# Altium PCB MCH_MAIN.PCBDOC (part 2 of 5)
Units mil, origin at the board's own origin, x right, y up, seen from the top; angles counter-clockwise.
Board outline 7194.88 x 2984.25 mil, 8 copper layers (Top Layer, MidLayer1, MidLayer2, GND, Power, MidLayer3, MidLayer4, Bottom Layer); 584 components, 952 nets, 3896 pads, 365 vias.
Unrouted connection lines stored in the file: 2112.
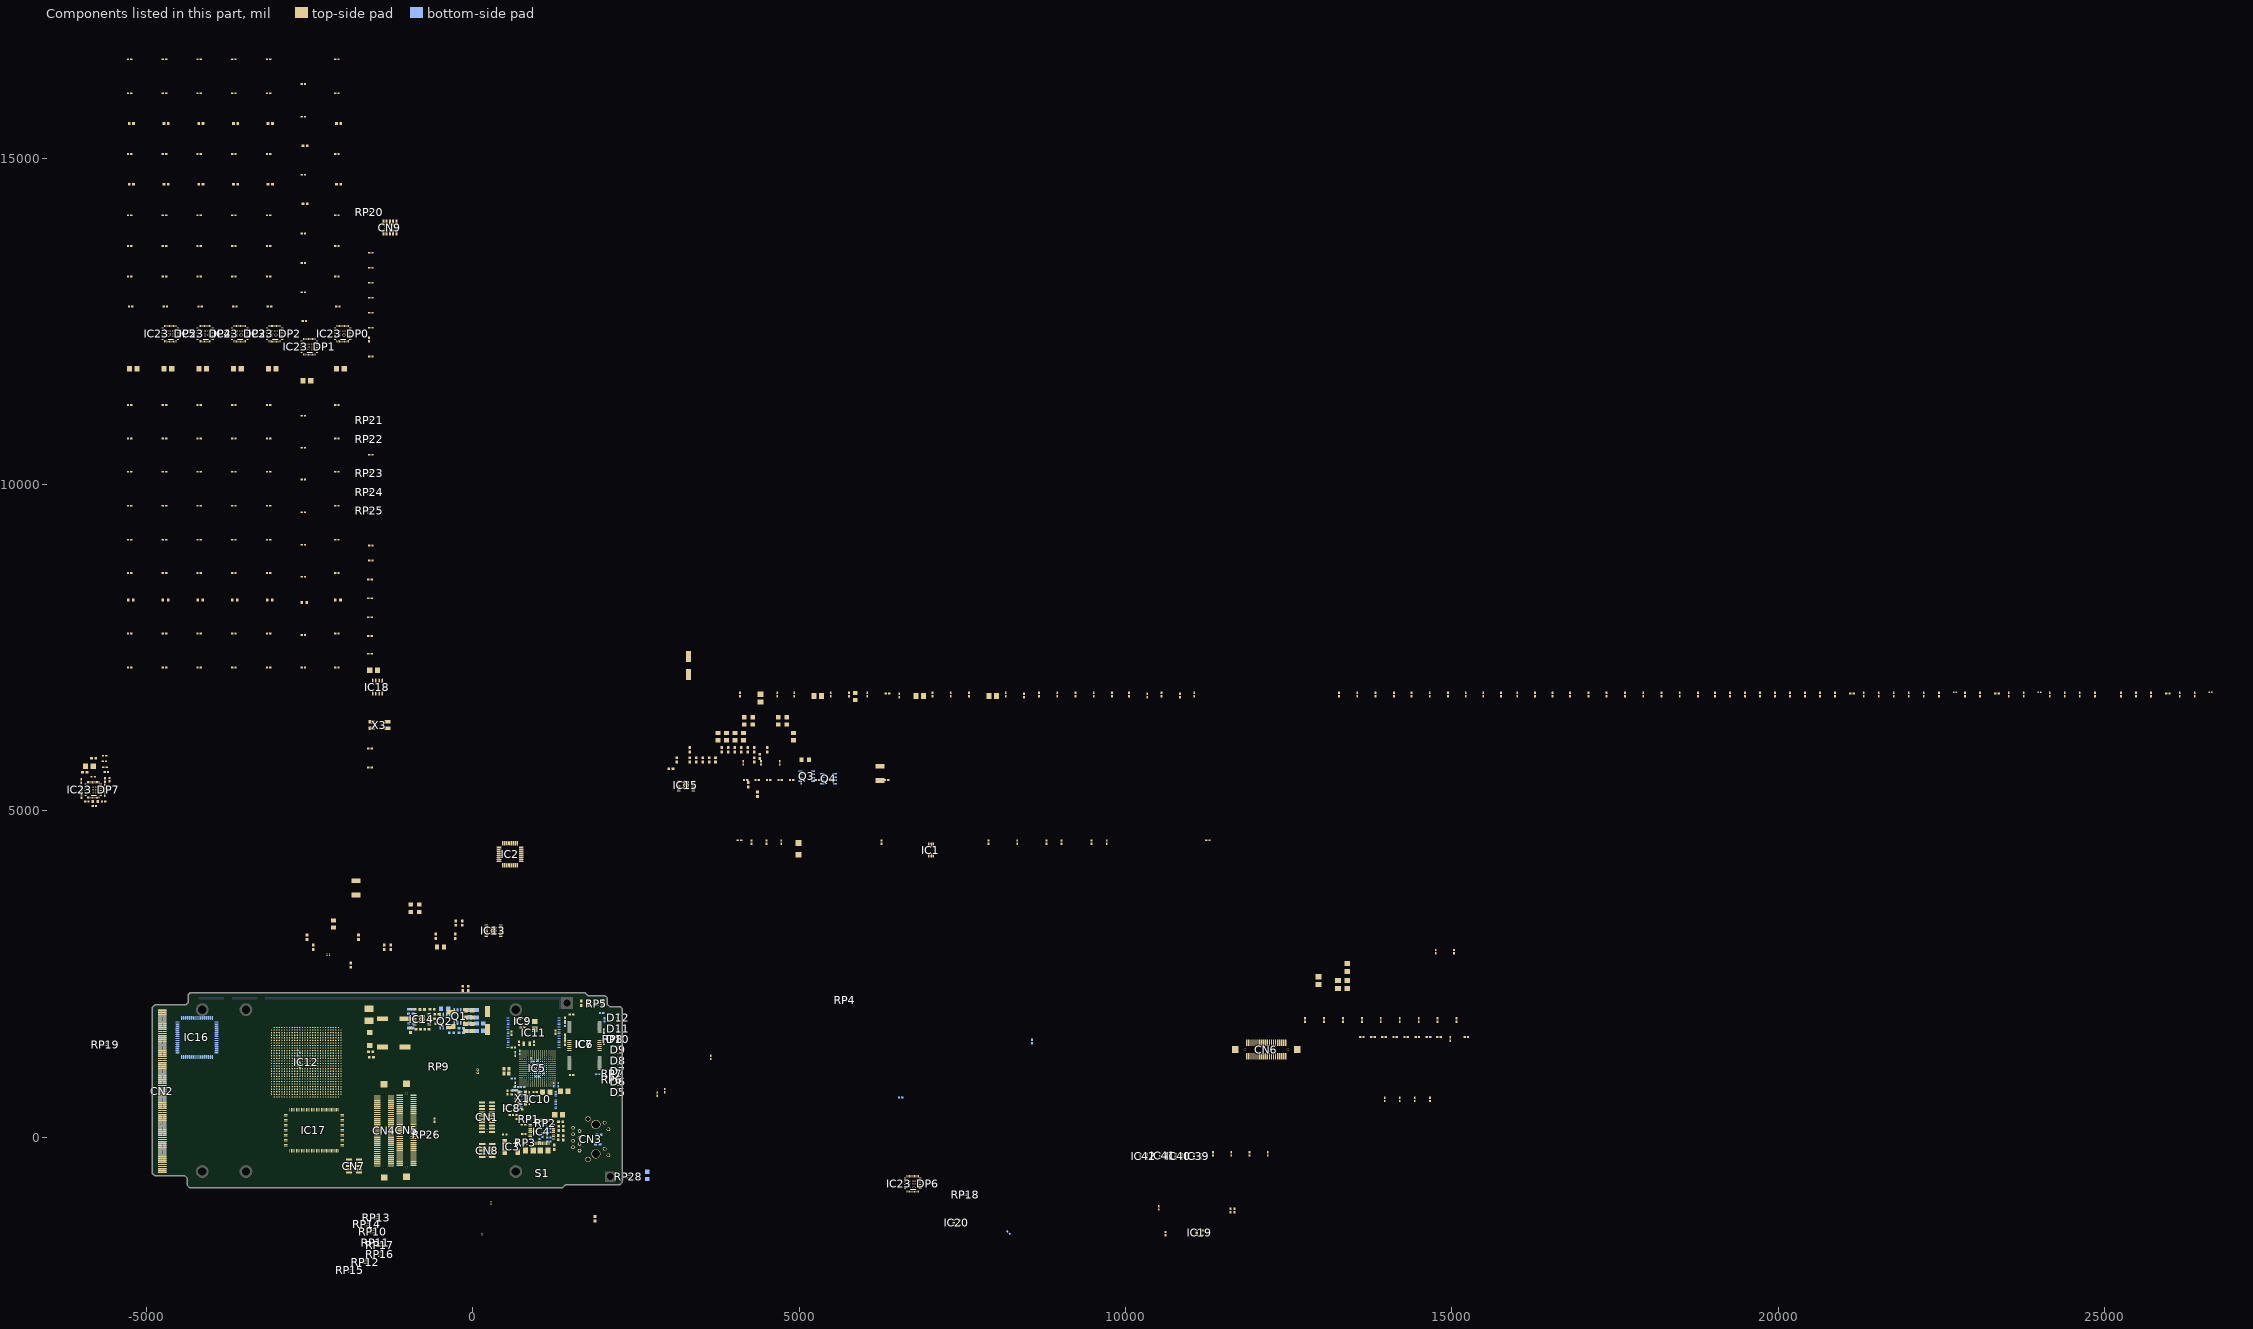
[diagram p5: the components of this part, seen from the top]

## Footprints (in the part's own frame and the unit in brackets; to place one, negate y for a bottom-side part, rotate by r counter-clockwise, add the part's x,y. Pads: shape width x height; smd on the part's side, far side on the other; paste and mask are expansions set on the pad)
64A_L [mm] "Thin QFP, 64-Leads, Body 14x14mm, Pitch 0.8mm, IPC High Density"
  oval 1.45x0.55 smd: 1(-7.6,6) 2(-7.6,5.2) 3(-7.6,4.4) 4(-7.6,3.6) 5(-7.6,2.8) 6(-7.6,2) 7(-7.6,1.2) 8(-7.6,0.4) 9(-7.6,-0.4) 10(-7.6,-1.2) 11(-7.6,-2) 12(-7.6,-2.8) 13(-7.6,-3.6) 14(-7.6,-4.4) 15(-7.6,-5.2) 16(-7.6,-6) 33(7.6,-6) 34(7.6,-5.2) 35(7.6,-4.4) 36(7.6,-3.6) 37(7.6,-2.8) 38(7.6,-2) 39(7.6,-1.2) 40(7.6,-0.4) 41(7.6,0.4) 42(7.6,1.2) 43(7.6,2) 44(7.6,2.8) 45(7.6,3.6) 46(7.6,4.4) 47(7.6,5.2) 48(7.6,6)
  oval 0.55x1.45 smd: 17(-6,-7.6) 18(-5.2,-7.6) 19(-4.4,-7.6) 20(-3.6,-7.6) 21(-2.8,-7.6) 22(-2,-7.6) 23(-1.2,-7.6) 24(-0.4,-7.6) 25(0.4,-7.6) 26(1.2,-7.6) 27(2,-7.6) 28(2.8,-7.6) 29(3.6,-7.6) 30(4.4,-7.6) 31(5.2,-7.6) 32(6,-7.6) 49(6,7.6) 50(5.2,7.6) 51(4.4,7.6) 52(3.6,7.6) 53(2.8,7.6) 54(2,7.6) 55(1.2,7.6) 56(0.4,7.6) 57(-0.4,7.6) 58(-1.2,7.6) 59(-2,7.6) 60(-2.8,7.6) 61(-3.6,7.6) 62(-4.4,7.6) 63(-5.2,7.6) 64(-6,7.6)
  silkscreen extent -7.72,-6.45 6.45,6.95, body extent -7,-7 7,7, height 1.2
ABRACON_ABMM [mm]
  rect 2.4x1.4 smd: 1(0,-2.6) 2(0,0) 3(6.3,0) 4(6.3,-2.6)
  silkscreen extent -1.52,-3.8 7.9,1.2
CC1005-0402 [mm]
  rect 0.9x0.7 smd: 1(-0.65,0) 2(0.65,0)
  silkscreen extent -1.5,-0.75 1,0.75
CC1608-0603 [mm]
  rect 1.1x1 smd: 1(-0.85,0) 2(0.85,0)
  silkscreen extent -1.8,-0.9 1.3,0.9
CC3216-1206 [mm]
  rect 1.6x1.8 smd: 1(-1.4,0) 2(1.4,0)
  silkscreen extent -2.6,-1.3 2.1,1.3
CD1608-0603 [mm] "Chip Diode; Body 1.6 x 0.8 mm (LxW typ)"
  rect 1.1x1 smd: 1(-0.85,0) 2(0.85,0)
  silkscreen extent 1.7,-0.4 1.7,0.4
CD2012-0805 [mm] "Chip Diode; Body 2.0 x 1.3 mm (LxW typ)"
  rect 1.3x1.5 smd: 1(-0.95,0) 2(0.95,0)
  silkscreen extent 1.9,-0.65 1.9,0.65
CD3216-1206 [mm] "Chip Diode; Body 3.2 x 1.6 mm (LxW typ)"
  rect 1.6x1.8 smd: 1(-1.4,0) 2(1.4,0)
  silkscreen extent -0.3,-0.8 0.3,0.8
CFPS_73 [mm]
  rect 1.8x2 smd: 1(0,-4.2) 2(5.08,-4.2) 3(5.08,0) 4(0,0)
  silkscreen extent -1.52,-5.59 6.6,1.52
con_1x2_1.27 [mm]
  round 1 hole 0.6 unplated: 1(0,0) 2(1.27,0)
  silkscreen extent -0.72,-0.75 1.98,0.75
CR1005-0402 [mm]
  rect 0.9x0.7 smd: 1(-0.65,0) 2(0.65,0)
  silkscreen extent -1.5,-0.75 1.5,0.75
CR1608-0603 [mm]
  rect 1.1x1 smd: 1(-0.85,0) 2(0.85,0)
  silkscreen extent -1.8,-0.9 1.8,0.9
DO-214AA/SMB [mm] "diode (Maritex)"
  rect 2x2 smd: A(-2.55,0) K(2.55,0)
  silkscreen extent -3.4,-1.75 3.5,1.75
DUOLED_LNJ123 [mm]
  rect 0.5x0.7 smd: 1(0.25,0) 2(3.05,0)
  rect 0.6x0.5 smd: 3(1.65,0.35)
  Top Layer region: 0.45,0.15 0.75,0.15 0.75,0.35 0.45,0.35
  Top Layer region: 0.45,-0.35 0.75,-0.35 0.75,-0.15 0.45,-0.15
  Top Layer region: 2.85,0.35 2.55,0.35 2.55,0.15 2.85,0.15
  Top Layer region: 2.85,-0.15 2.55,-0.15 2.55,-0.35 2.85,-0.35
  silkscreen extent -0.3,-1.45 3.6,0.7
eTSSOP_16_MX [mm] "SOP, 16-Leads, Body 5x4.4mm, Pitch 0.65mm, IPC High Density"
  oval 1.4x0.35 smd: 1(-2.8,2.275) 2(-2.8,1.625) 3(-2.8,0.975) 4(-2.8,0.325) 5(-2.8,-0.325) 6(-2.8,-0.975) 7(-2.8,-1.625) 8(-2.8,-2.275) 9(2.8,-2.275) 10(2.8,-1.625) 11(2.8,-0.975) 12(2.8,-0.325) 13(2.8,0.325) 14(2.8,0.975) 15(2.8,1.625) 16(2.8,2.275)
  round 1.2 hole 0.6: PAD(-0.55,1.1) PAD(-0.55,0) PAD(-0.55,-1.1) PAD(0.55,1.1) PAD(0.55,0) PAD(0.55,-1.1)
  Top Layer region: -1.15,-1.7 1.15,-1.7 1.15,1.7 -1.15,1.7
  silkscreen extent -2.93,-2.55 1.7,3.12
FBGA780-2 [mm] "BGA, 780-Leads, Body 29x29mm, Pitch 1mm"
  round 0.5 smd: A2(-12.5,13.5) A3(-11.5,13.5) A4(-10.5,13.5) A5(-9.5,13.5) A6(-8.5,13.5) A7(-7.5,13.5) A8(-6.5,13.5) A9(-5.5,13.5) A10(-4.5,13.5) A11(-3.5,13.5) A12(-2.5,13.5) A13(-1.5,13.5) A14(-0.5,13.5) A15(0.5,13.5) A16(1.5,13.5) A17(2.5,13.5) A18(3.5,13.5) A19(4.5,13.5) A20(5.5,13.5) A21(6.5,13.5) A22(7.5,13.5) A23(8.5,13.5) A24(9.5,13.5) A25(10.5,13.5) A26(11.5,13.5) A27(12.5,13.5) AA1(-13.5,-6.5) AA2(-12.5,-6.5) AA3(-11.5,-6.5) AA4(-10.5,-6.5) AA5(-9.5,-6.5) AA6(-8.5,-6.5) AA7(-7.5,-6.5) AA8(-6.5,-6.5) AA9(-5.5,-6.5) AA10(-4.5,-6.5) AA11(-3.5,-6.5) AA12(-2.5,-6.5) AA13(-1.5,-6.5) AA14(-0.5,-6.5) AA15(0.5,-6.5) AA16(1.5,-6.5) AA17(2.5,-6.5) AA18(3.5,-6.5) AA19(4.5,-6.5) AA20(5.5,-6.5) AA21(6.5,-6.5) AA22(7.5,-6.5) AA23(8.5,-6.5) AA24(9.5,-6.5) AA25(10.5,-6.5) AA26(11.5,-6.5) AA27(12.5,-6.5) AA28(13.5,-6.5) AB1(-13.5,-7.5) AB2(-12.5,-7.5) AB3(-11.5,-7.5) AB4(-10.5,-7.5) AB5(-9.5,-7.5) AB6(-8.5,-7.5) AB7(-7.5,-7.5) AB8(-6.5,-7.5) AB9(-5.5,-7.5) AB10(-4.5,-7.5) AB11(-3.5,-7.5) AB12(-2.5,-7.5) AB13(-1.5,-7.5) AB14(-0.5,-7.5) AB15(0.5,-7.5) AB16(1.5,-7.5) AB17(2.5,-7.5) AB18(3.5,-7.5) AB19(4.5,-7.5) AB20(5.5,-7.5) AB21(6.5,-7.5) AB22(7.5,-7.5) AB23(8.5,-7.5) AB24(9.5,-7.5) AB25(10.5,-7.5) AB26(11.5,-7.5) AB27(12.5,-7.5) AB28(13.5,-7.5) AC1(-13.5,-8.5) AC2(-12.5,-8.5) AC3(-11.5,-8.5) AC4(-10.5,-8.5) AC5(-9.5,-8.5) AC6(-8.5,-8.5) AC7(-7.5,-8.5) AC8(-6.5,-8.5) AC9(-5.5,-8.5) AC10(-4.5,-8.5) AC11(-3.5,-8.5) AC12(-2.5,-8.5) AC13(-1.5,-8.5) AC14(-0.5,-8.5) AC15(0.5,-8.5) AC16(1.5,-8.5) AC17(2.5,-8.5) AC18(3.5,-8.5) AC19(4.5,-8.5) AC20(5.5,-8.5) AC21(6.5,-8.5) AC22(7.5,-8.5) AC23(8.5,-8.5) AC24(9.5,-8.5) AC25(10.5,-8.5) AC26(11.5,-8.5) AC27(12.5,-8.5) AC28(13.5,-8.5) AD1(-13.5,-9.5) AD2(-12.5,-9.5) AD3(-11.5,-9.5) AD4(-10.5,-9.5) AD5(-9.5,-9.5) AD6(-8.5,-9.5) AD7(-7.5,-9.5) AD8(-6.5,-9.5) AD9(-5.5,-9.5) AD10(-4.5,-9.5) AD11(-3.5,-9.5) AD12(-2.5,-9.5) AD13(-1.5,-9.5) AD14(-0.5,-9.5) AD15(0.5,-9.5) AD16(1.5,-9.5) AD17(2.5,-9.5) AD18(3.5,-9.5) AD19(4.5,-9.5) AD20(5.5,-9.5) AD21(6.5,-9.5) AD22(7.5,-9.5) AD23(8.5,-9.5) AD24(9.5,-9.5) AD25(10.5,-9.5) AD26(11.5,-9.5) AD27(12.5,-9.5) AD28(13.5,-9.5) AE1(-13.5,-10.5) AE2(-12.5,-10.5) AE3(-11.5,-10.5) AE4(-10.5,-10.5) AE5(-9.5,-10.5) AE6(-8.5,-10.5) AE7(-7.5,-10.5) AE8(-6.5,-10.5) AE9(-5.5,-10.5) AE10(-4.5,-10.5) AE11(-3.5,-10.5) AE12(-2.5,-10.5) AE13(-1.5,-10.5) AE14(-0.5,-10.5) AE15(0.5,-10.5) AE16(1.5,-10.5) AE17(2.5,-10.5) AE18(3.5,-10.5) AE19(4.5,-10.5) AE20(5.5,-10.5) AE21(6.5,-10.5) AE22(7.5,-10.5) AE23(8.5,-10.5) AE24(9.5,-10.5) AE25(10.5,-10.5) AE26(11.5,-10.5) AE27(12.5,-10.5) AE28(13.5,-10.5) AF1(-13.5,-11.5) AF2(-12.5,-11.5) AF3(-11.5,-11.5) AF4(-10.5,-11.5) AF5(-9.5,-11.5) AF6(-8.5,-11.5) AF7(-7.5,-11.5) AF8(-6.5,-11.5) AF9(-5.5,-11.5) AF10(-4.5,-11.5) AF11(-3.5,-11.5) AF12(-2.5,-11.5) AF13(-1.5,-11.5) AF14(-0.5,-11.5) AF15(0.5,-11.5) AF16(1.5,-11.5) AF17(2.5,-11.5) AF18(3.5,-11.5) AF19(4.5,-11.5) AF20(5.5,-11.5) AF21(6.5,-11.5) AF22(7.5,-11.5) AF23(8.5,-11.5) AF24(9.5,-11.5) AF25(10.5,-11.5) AF26(11.5,-11.5) AF27(12.5,-11.5) AF28(13.5,-11.5) AG1(-13.5,-12.5) AG2(-12.5,-12.5) AG3(-11.5,-12.5) AG4(-10.5,-12.5) AG5(-9.5,-12.5) AG6(-8.5,-12.5) AG7(-7.5,-12.5) AG8(-6.5,-12.5) AG9(-5.5,-12.5) AG10(-4.5,-12.5) AG11(-3.5,-12.5) AG12(-2.5,-12.5) AG13(-1.5,-12.5) AG14(-0.5,-12.5) AG15(0.5,-12.5) AG16(1.5,-12.5) AG17(2.5,-12.5) AG18(3.5,-12.5) AG19(4.5,-12.5) AG20(5.5,-12.5) AG21(6.5,-12.5) AG22(7.5,-12.5) AG23(8.5,-12.5) AG24(9.5,-12.5) AG25(10.5,-12.5) AG26(11.5,-12.5) AG27(12.5,-12.5) AG28(13.5,-12.5) AH2(-12.5,-13.5) AH3(-11.5,-13.5) AH4(-10.5,-13.5) AH5(-9.5,-13.5) AH6(-8.5,-13.5) AH7(-7.5,-13.5) AH8(-6.5,-13.5) AH9(-5.5,-13.5) AH10(-4.5,-13.5) AH11(-3.5,-13.5) AH12(-2.5,-13.5) AH13(-1.5,-13.5) AH14(-0.5,-13.5) AH15(0.5,-13.5) AH16(1.5,-13.5) AH17(2.5,-13.5) AH18(3.5,-13.5) AH19(4.5,-13.5) AH20(5.5,-13.5) AH21(6.5,-13.5) AH22(7.5,-13.5) AH23(8.5,-13.5) AH24(9.5,-13.5) AH25(10.5,-13.5) AH26(11.5,-13.5) AH27(12.5,-13.5) B1(-13.5,12.5) B2(-12.5,12.5) B3(-11.5,12.5) B4(-10.5,12.5) B5(-9.5,12.5) B6(-8.5,12.5) B7(-7.5,12.5) B8(-6.5,12.5) B9(-5.5,12.5) B10(-4.5,12.5) B11(-3.5,12.5) B12(-2.5,12.5) B13(-1.5,12.5) B14(-0.5,12.5) B15(0.5,12.5) B16(1.5,12.5) B17(2.5,12.5) B18(3.5,12.5) B19(4.5,12.5) B20(5.5,12.5) B21(6.5,12.5) B22(7.5,12.5) B23(8.5,12.5) B24(9.5,12.5) B25(10.5,12.5) B26(11.5,12.5) B27(12.5,12.5) B28(13.5,12.5) C1(-13.5,11.5) C2(-12.5,11.5) C3(-11.5,11.5) C4(-10.5,11.5) C5(-9.5,11.5) C6(-8.5,11.5) C7(-7.5,11.5) C8(-6.5,11.5) C9(-5.5,11.5) C10(-4.5,11.5) C11(-3.5,11.5) C12(-2.5,11.5) C13(-1.5,11.5) C14(-0.5,11.5) C15(0.5,11.5) C16(1.5,11.5) C17(2.5,11.5) C18(3.5,11.5) C19(4.5,11.5) C20(5.5,11.5) C21(6.5,11.5) C22(7.5,11.5) C23(8.5,11.5) C24(9.5,11.5) C25(10.5,11.5) C26(11.5,11.5) C27(12.5,11.5) C28(13.5,11.5) D1(-13.5,10.5) D2(-12.5,10.5) D3(-11.5,10.5) D4(-10.5,10.5) D5(-9.5,10.5) D6(-8.5,10.5) D7(-7.5,10.5) D8(-6.5,10.5) D9(-5.5,10.5) D10(-4.5,10.5) D11(-3.5,10.5) D12(-2.5,10.5) D13(-1.5,10.5) D14(-0.5,10.5) D15(0.5,10.5) D16(1.5,10.5) D17(2.5,10.5) D18(3.5,10.5) D19(4.5,10.5) D20(5.5,10.5) D21(6.5,10.5) D22(7.5,10.5) D23(8.5,10.5) D24(9.5,10.5) D25(10.5,10.5) D26(11.5,10.5) D27(12.5,10.5) D28(13.5,10.5) E1(-13.5,9.5) E2(-12.5,9.5) E3(-11.5,9.5) E4(-10.5,9.5) E5(-9.5,9.5) E6(-8.5,9.5) E7(-7.5,9.5) E8(-6.5,9.5) E9(-5.5,9.5) E10(-4.5,9.5) E11(-3.5,9.5) E12(-2.5,9.5) E13(-1.5,9.5) E14(-0.5,9.5) E15(0.5,9.5) E16(1.5,9.5) E17(2.5,9.5) E18(3.5,9.5) E19(4.5,9.5) E20(5.5,9.5) E21(6.5,9.5) E22(7.5,9.5) E23(8.5,9.5) E24(9.5,9.5) E25(10.5,9.5) E26(11.5,9.5) E27(12.5,9.5) E28(13.5,9.5) F1(-13.5,8.5) F2(-12.5,8.5) F3(-11.5,8.5) F4(-10.5,8.5) F5(-9.5,8.5) F6(-8.5,8.5) F7(-7.5,8.5) F8(-6.5,8.5) F9(-5.5,8.5) F10(-4.5,8.5) F11(-3.5,8.5) F12(-2.5,8.5) F13(-1.5,8.5) F14(-0.5,8.5) F15(0.5,8.5) F16(1.5,8.5) F17(2.5,8.5) F18(3.5,8.5) F19(4.5,8.5) F20(5.5,8.5) F21(6.5,8.5) F22(7.5,8.5) F23(8.5,8.5) F24(9.5,8.5) F25(10.5,8.5) F26(11.5,8.5) F27(12.5,8.5) F28(13.5,8.5) G1(-13.5,7.5) G2(-12.5,7.5) G3(-11.5,7.5) G4(-10.5,7.5) G5(-9.5,7.5) G6(-8.5,7.5) G7(-7.5,7.5) G8(-6.5,7.5) G9(-5.5,7.5) G10(-4.5,7.5) G11(-3.5,7.5) G12(-2.5,7.5) G13(-1.5,7.5) G14(-0.5,7.5) G15(0.5,7.5) G16(1.5,7.5) G17(2.5,7.5) G18(3.5,7.5) G19(4.5,7.5) G20(5.5,7.5) G21(6.5,7.5) G22(7.5,7.5) G23(8.5,7.5) G24(9.5,7.5) G25(10.5,7.5) G26(11.5,7.5) G27(12.5,7.5) G28(13.5,7.5) H1(-13.5,6.5) H2(-12.5,6.5) H3(-11.5,6.5) H4(-10.5,6.5) H5(-9.5,6.5) H6(-8.5,6.5) H7(-7.5,6.5) H8(-6.5,6.5) H9(-5.5,6.5) H10(-4.5,6.5) H11(-3.5,6.5) H12(-2.5,6.5) H13(-1.5,6.5) H14(-0.5,6.5) H15(0.5,6.5) H16(1.5,6.5) H17(2.5,6.5) H18(3.5,6.5) H19(4.5,6.5) H20(5.5,6.5) H21(6.5,6.5) H22(7.5,6.5) H23(8.5,6.5) H24(9.5,6.5) H25(10.5,6.5) H26(11.5,6.5) H27(12.5,6.5) H28(13.5,6.5) J1(-13.5,5.5) J2(-12.5,5.5) J3(-11.5,5.5) J4(-10.5,5.5) J5(-9.5,5.5) J6(-8.5,5.5) J7(-7.5,5.5) J8(-6.5,5.5) J9(-5.5,5.5) J10(-4.5,5.5) J11(-3.5,5.5) J12(-2.5,5.5) J13(-1.5,5.5) J14(-0.5,5.5) J15(0.5,5.5) J16(1.5,5.5) J17(2.5,5.5) J18(3.5,5.5) J19(4.5,5.5) J20(5.5,5.5) J21(6.5,5.5) J22(7.5,5.5) J23(8.5,5.5) J24(9.5,5.5) J25(10.5,5.5) J26(11.5,5.5) J27(12.5,5.5) J28(13.5,5.5) K1(-13.5,4.5) K2(-12.5,4.5) K3(-11.5,4.5) K4(-10.5,4.5) K5(-9.5,4.5) K6(-8.5,4.5) K7(-7.5,4.5) K8(-6.5,4.5) K9(-5.5,4.5) K10(-4.5,4.5) K11(-3.5,4.5) K12(-2.5,4.5) K13(-1.5,4.5) K14(-0.5,4.5) K15(0.5,4.5) K16(1.5,4.5) K17(2.5,4.5) K18(3.5,4.5) K19(4.5,4.5) K20(5.5,4.5) K21(6.5,4.5) K22(7.5,4.5) K23(8.5,4.5) K24(9.5,4.5) K25(10.5,4.5) K26(11.5,4.5) K27(12.5,4.5) K28(13.5,4.5) L1(-13.5,3.5) L2(-12.5,3.5) L3(-11.5,3.5) L4(-10.5,3.5) L5(-9.5,3.5) L6(-8.5,3.5) L7(-7.5,3.5) L8(-6.5,3.5) L9(-5.5,3.5) L10(-4.5,3.5) L11(-3.5,3.5) L12(-2.5,3.5) L13(-1.5,3.5) L14(-0.5,3.5) L15(0.5,3.5) L16(1.5,3.5) L17(2.5,3.5) L18(3.5,3.5) L19(4.5,3.5) L20(5.5,3.5) L21(6.5,3.5) L22(7.5,3.5) L23(8.5,3.5) L24(9.5,3.5) L25(10.5,3.5) L26(11.5,3.5) L27(12.5,3.5) L28(13.5,3.5) M1(-13.5,2.5) M2(-12.5,2.5) M3(-11.5,2.5) M4(-10.5,2.5) M5(-9.5,2.5) M6(-8.5,2.5) M7(-7.5,2.5) M8(-6.5,2.5) M9(-5.5,2.5) M10(-4.5,2.5) M11(-3.5,2.5) M12(-2.5,2.5) M13(-1.5,2.5) M14(-0.5,2.5) M15(0.5,2.5) M16(1.5,2.5) M17(2.5,2.5) M18(3.5,2.5) M19(4.5,2.5) M20(5.5,2.5) M21(6.5,2.5) M22(7.5,2.5) M23(8.5,2.5) M24(9.5,2.5) M25(10.5,2.5) M26(11.5,2.5) M27(12.5,2.5) M28(13.5,2.5) N1(-13.5,1.5) N2(-12.5,1.5) N3(-11.5,1.5) N4(-10.5,1.5) N5(-9.5,1.5) N6(-8.5,1.5) N7(-7.5,1.5) N8(-6.5,1.5) N9(-5.5,1.5) N10(-4.5,1.5) N11(-3.5,1.5) N12(-2.5,1.5) N13(-1.5,1.5) N14(-0.5,1.5) N15(0.5,1.5) N16(1.5,1.5) N17(2.5,1.5) N18(3.5,1.5) N19(4.5,1.5) N20(5.5,1.5) N21(6.5,1.5) N22(7.5,1.5) N23(8.5,1.5) N24(9.5,1.5) N25(10.5,1.5) N26(11.5,1.5) N27(12.5,1.5) N28(13.5,1.5) P1(-13.5,0.5) P2(-12.5,0.5) P3(-11.5,0.5) P4(-10.5,0.5) P5(-9.5,0.5) P6(-8.5,0.5) P7(-7.5,0.5) P8(-6.5,0.5) P9(-5.5,0.5) P10(-4.5,0.5) P11(-3.5,0.5) P12(-2.5,0.5) P13(-1.5,0.5) P14(-0.5,0.5) P15(0.5,0.5) P16(1.5,0.5) P17(2.5,0.5) P18(3.5,0.5) P19(4.5,0.5) P20(5.5,0.5) P21(6.5,0.5) P22(7.5,0.5) P23(8.5,0.5) P24(9.5,0.5) P25(10.5,0.5) P26(11.5,0.5) P27(12.5,0.5) P28(13.5,0.5) R1(-13.5,-0.5) R2(-12.5,-0.5) R3(-11.5,-0.5) R4(-10.5,-0.5) R5(-9.5,-0.5) R6(-8.5,-0.5) R7(-7.5,-0.5) R8(-6.5,-0.5) R9(-5.5,-0.5) R10(-4.5,-0.5) R11(-3.5,-0.5) R12(-2.5,-0.5) R13(-1.5,-0.5) R14(-0.5,-0.5) R15(0.5,-0.5) R16(1.5,-0.5) R17(2.5,-0.5) R18(3.5,-0.5) R19(4.5,-0.5) R20(5.5,-0.5) R21(6.5,-0.5) R22(7.5,-0.5) R23(8.5,-0.5) R24(9.5,-0.5) R25(10.5,-0.5) R26(11.5,-0.5) R27(12.5,-0.5) R28(13.5,-0.5) T1(-13.5,-1.5) T2(-12.5,-1.5) T3(-11.5,-1.5) T4(-10.5,-1.5) T5(-9.5,-1.5) T6(-8.5,-1.5) T7(-7.5,-1.5) T8(-6.5,-1.5) T9(-5.5,-1.5) T10(-4.5,-1.5) T11(-3.5,-1.5) T12(-2.5,-1.5) T13(-1.5,-1.5) T14(-0.5,-1.5) T15(0.5,-1.5) T16(1.5,-1.5) T17(2.5,-1.5) T18(3.5,-1.5) T19(4.5,-1.5) T20(5.5,-1.5) T21(6.5,-1.5) T22(7.5,-1.5) T23(8.5,-1.5) T24(9.5,-1.5) T25(10.5,-1.5) T26(11.5,-1.5) T27(12.5,-1.5) T28(13.5,-1.5) U1(-13.5,-2.5) U2(-12.5,-2.5) U3(-11.5,-2.5) U4(-10.5,-2.5) U5(-9.5,-2.5) U6(-8.5,-2.5) U7(-7.5,-2.5) U8(-6.5,-2.5) U9(-5.5,-2.5) U10(-4.5,-2.5) U11(-3.5,-2.5) U12(-2.5,-2.5) U13(-1.5,-2.5) U14(-0.5,-2.5) U15(0.5,-2.5) U16(1.5,-2.5) U17(2.5,-2.5) U18(3.5,-2.5) U19(4.5,-2.5) U20(5.5,-2.5) U21(6.5,-2.5) U22(7.5,-2.5) U23(8.5,-2.5) U24(9.5,-2.5) U25(10.5,-2.5) U26(11.5,-2.5) U27(12.5,-2.5) U28(13.5,-2.5) V1(-13.5,-3.5) V2(-12.5,-3.5) V3(-11.5,-3.5) V4(-10.5,-3.5) V5(-9.5,-3.5) V6(-8.5,-3.5) V7(-7.5,-3.5) V8(-6.5,-3.5) V9(-5.5,-3.5) V10(-4.5,-3.5) V11(-3.5,-3.5) V12(-2.5,-3.5) V13(-1.5,-3.5) V14(-0.5,-3.5) V15(0.5,-3.5) V16(1.5,-3.5) V17(2.5,-3.5) V18(3.5,-3.5) V19(4.5,-3.5) V20(5.5,-3.5) V21(6.5,-3.5) V22(7.5,-3.5) V23(8.5,-3.5) V24(9.5,-3.5) V25(10.5,-3.5) V26(11.5,-3.5) V27(12.5,-3.5) V28(13.5,-3.5) W1(-13.5,-4.5) W2(-12.5,-4.5) W3(-11.5,-4.5) W4(-10.5,-4.5) W5(-9.5,-4.5) W6(-8.5,-4.5) W7(-7.5,-4.5) W8(-6.5,-4.5) W9(-5.5,-4.5) W10(-4.5,-4.5) W11(-3.5,-4.5) W12(-2.5,-4.5) W13(-1.5,-4.5) W14(-0.5,-4.5) W15(0.5,-4.5) W16(1.5,-4.5) W17(2.5,-4.5) W18(3.5,-4.5) W19(4.5,-4.5) W20(5.5,-4.5) W21(6.5,-4.5) W22(7.5,-4.5) W23(8.5,-4.5) W24(9.5,-4.5) W25(10.5,-4.5) W26(11.5,-4.5) W27(12.5,-4.5) W28(13.5,-4.5) Y1(-13.5,-5.5) Y2(-12.5,-5.5) Y3(-11.5,-5.5) Y4(-10.5,-5.5) Y5(-9.5,-5.5) Y6(-8.5,-5.5) Y7(-7.5,-5.5) Y8(-6.5,-5.5) Y9(-5.5,-5.5) Y10(-4.5,-5.5) Y11(-3.5,-5.5) Y12(-2.5,-5.5) Y13(-1.5,-5.5) Y14(-0.5,-5.5) Y15(0.5,-5.5) Y16(1.5,-5.5) Y17(2.5,-5.5) Y18(3.5,-5.5) Y19(4.5,-5.5) Y20(5.5,-5.5) Y21(6.5,-5.5) Y22(7.5,-5.5) Y23(8.5,-5.5) Y24(9.5,-5.5) Y25(10.5,-5.5) Y26(11.5,-5.5) Y27(12.5,-5.5) Y28(13.5,-5.5)
  silkscreen extent -15.27,-14.5 14.5,14.5, body extent -14.5,-14.5 14.5,14.5, height 2.6
IHLP2525 [mm]
  rect 1.9x3.5 smd: 1(-2.75,0) 2(2.75,0)
  silkscreen extent -3.4,-3.3 3.45,3.2
INDC1005-0402 [mm] "Chip Inductor; Body 1 x 0.5 mm (LxW typ)"
  rect 0.6x0.5 smd: 1(-0.5,0) 2(0.5,0)
  silkscreen extent -1.1,-0.15 -1.1,0.15
INDC1608-0603 [mm] "Chip Inductor; Body 1.6 x 0.8 mm (LxW typ)"
  rect 0.9x0.8 smd: 1(-0.7,0) 2(0.7,0)
  silkscreen extent -1.45,-0.3 -1.45,0.3
INDC2012-0805 [mm] "Chip Inductor; Body 2 x 1.2 mm (LxW typ)"
  rect 1x1.2 smd: 1(-1,0) 2(1,0)
  silkscreen extent -0.2,-0.5 0.2,0.5
J0011D21BNL [mm] "ethernet trafo with magnetics and LEDs"
  round 2.032 hole 1.6: 0a(-13.589,-3.048) 0b(2.159,-3.048)
  round 3.556 hole 3.2: 0c(-11.43,0) 0d(0,0)
  round 1.4 hole 0.9: 1(-1.27,-6.35) 2(-2.54,-8.89) 3(-3.81,-6.35) 4(-5.08,-8.89) 5(-6.35,-6.35) 6(-7.62,-8.89) 7(-8.89,-6.35) 8(-10.16,-8.89)
  round 1.4 hole 1: 9(0.61,4.902) 10(-1.93,3.378) 11(-9.5,4.902) 12(-12.04,3.378)
  silkscreen extent -13.59,-10.79 2.16,10.79
JAE_KX15_40P [mm]
  rect 0.5x2.4 smd: 1(-7.6,2.65) 2(-7.6,-2.65) 3(-6.8,2.65) 4(-6.8,-2.65) 5(-6,2.65) 6(-6,-2.65) 7(-5.2,2.65) 8(-5.2,-2.65) 9(-4.4,2.65) 10(-4.4,-2.65) 11(-3.6,2.65) 12(-3.6,-2.65) 13(-2.8,2.65) 14(-2.8,-2.65) 15(-2,2.65) 16(-2,-2.65) 17(-1.2,2.65) 18(-1.2,-2.65) 19(-0.4,2.65) 20(-0.4,-2.65) 21(0.4,2.65) 22(0.4,-2.65) 23(1.2,2.65) 24(1.2,-2.65) 25(2,2.65) 26(2,-2.65) 27(2.8,2.65) 28(2.8,-2.65) 29(3.6,2.65) 30(3.6,-2.65) 31(4.4,2.65) 32(4.4,-2.65) 33(5.2,2.65) 34(5.2,-2.65) 35(6,2.65) 36(6,-2.65) 37(6.8,2.65) 38(6.8,-2.65) 39(7.6,2.65) 40(7.6,-2.65)
  rect 2.5x2.7 smd: ""(-12.1,0) ""(12.1,0.05)
  round 0.9 hole 0.9: ""(-8.35,0) ""(8.35,0)
  silkscreen extent -12,-3.75 12,3.75
JAE_KX15_70p [mm]
  rect 0.5x2.4 smd: 1(-13.6,2.65) 2(-13.6,-2.65) 3(-12.8,2.65) 4(-12.8,-2.65) 5(-12,2.65) 6(-12,-2.65) 7(-11.2,2.65) 8(-11.2,-2.65) 9(-10.4,2.65) 10(-10.4,-2.65) 11(-9.6,2.65) 12(-9.6,-2.65) 13(-8.8,2.65) 14(-8.8,-2.65) 15(-8,2.65) 16(-8,-2.65) 17(-7.2,2.65) 18(-7.2,-2.65) 19(-6.4,2.65) 20(-6.4,-2.65) 21(-5.6,2.65) 22(-5.6,-2.65) 23(-4.8,2.65) 24(-4.8,-2.65) 25(-4,2.65) 26(-4,-2.65) 27(-3.2,2.65) 28(-3.2,-2.65) 29(-2.4,2.65) 30(-2.4,-2.65) 31(-1.6,2.65) 32(-1.6,-2.65) 33(-0.8,2.65) 34(-0.8,-2.65) 35(0,2.65) 36(0,-2.65) 37(0.8,2.65) 38(0.8,-2.65) 39(1.6,2.65) 40(1.6,-2.65) 41(2.4,2.65) 42(2.4,-2.65) 43(3.2,2.65) 44(3.2,-2.65) 45(4,2.65) 46(4,-2.65) 47(4.8,2.65) 48(4.8,-2.65) 49(5.6,2.65) 50(5.6,-2.65) 51(6.4,2.65) 52(6.4,-2.65) 53(7.2,2.65) 54(7.2,-2.65) 55(8,2.65) 56(8,-2.65) 57(8.8,2.65) 58(8.8,-2.65) 59(9.6,2.65) 60(9.6,-2.65) 61(10.4,2.65) 62(10.4,-2.65) 63(11.2,2.65) 64(11.2,-2.65) 65(12,2.65) 66(12,-2.65) 67(12.8,2.65) 68(12.8,-2.65) 69(13.6,2.65) 70(13.6,-2.65)
  rect 2.5x2.7 smd: ""(-18.1,0) ""(18.1,0.05)
  round 0.9 hole 0.9: ""(-14.35,0) ""(14.35,0)
  silkscreen extent -18,-3.75 18,3.75
LQFP48l [mil]
  oval 50x12 smd: 1(0,0)
  rect 50x12 smd: 2(0,-20) 3(0,-40) 4(0,-60) 5(0,-80) 6(0,-100) 7(0,-120) 8(0,-140) 9(0,-160) 10(0,-180) 11(0,-200) 12(0,-220) 25(354,-220) 26(354,-200) 27(354,-180) 28(354,-160) 29(354,-140) 30(354,-120) 31(354,-100) 32(354,-80) 33(354,-60) 34(354,-40) 35(354,-20) 36(354,0)
  rect 12x50 smd: 13(67,-287) 14(87,-287) 15(107,-287) 16(127,-287) 17(147,-287) 18(167,-287) 19(187,-287) 20(207,-287) 21(227,-287) 22(247,-287) 23(267,-287) 24(287,-287) 37(287,67) 38(267,67) 39(247,67) 40(227,67) 41(207,67) 42(187,67) 43(167,67) 44(147,67) 45(127,67) 46(107,67) 47(87,67) 48(67,67)
  silkscreen extent 46,-241 308,21
OSCON_E7 [mm]
  rect 4.2x1.9 smd: 1(-3.5,0) 2(3.5,0)
  silkscreen extent -4.2,-4.1 4.1,4.1
OSCON_F12 [mm]
  rect 4.4x1.9 smd: 1(-4.35,0) 2(4.35,0)
  silkscreen extent -5.3,-5.2 5,5.1
PLANE_CONNECT_POINT [mm]
  round 0.25 smd: 1(-0.3,0) 2(0.3,0)
  Top Layer lines w0.254: -0.3,0 0.3,0
PLHTD10S-GC [mm] "SMT 1.27 mm dual goldpin"
  rect 0.76x2.4 smd: 1(0,0) 2(0,3.9) 3(1.27,0) 4(1.27,3.9) 5(2.54,0) 6(2.54,3.9) 7(3.81,0) 8(3.81,3.9) 9(5.08,0) 10(5.08,3.9)
  round 0.8 hole 0.8: ""(0.635,1.95) ""(4.5,2)
  silkscreen extent -1.27,-0.64 6.3,4.45
PLHTD20S-GC [mm] "SMT 1.27 mm dual goldpin"
  round 0.8 hole 0.8: 0(0.635,1.95) ""(10.795,1.95)
  rect 0.76x2.4 smd: 1(0,0) 2(0,3.9) 3(1.27,0) 4(1.27,3.9) 5(2.54,0) 6(2.54,3.9) 7(3.81,0) 8(3.81,3.9) 9(5.08,0) 10(5.08,3.9) 11(6.35,0) 12(6.35,3.9) 13(7.62,0) 14(7.62,3.9) 15(8.89,0) 16(8.89,3.9) 17(10.16,0) 18(10.16,3.9) 19(11.43,0) 20(11.43,3.9)
  silkscreen extent -1.27,-0.64 12.7,4.45
PTC_SMD_1812 [mm] "PTC FUSE SMD1812 (Maritex)"
  rect 2.5x3.5 smd: 1(-2.365,0) 2(2.365,0)
  silkscreen extent -4.37,-2.5 4.37,2.5
QFN40_powerpad [mm]
  rrect50% 0.85x0.23 smd: 1(0.425,5.65) 2(0.425,5.15) 3(0.425,4.65) 4(0.425,4.15) 5(0.425,3.65) 6(0.425,3.15) 7(0.425,2.65) 8(0.425,2.15) 9(0.425,1.65) 10(0.425,1.15) 21(6.375,1.15) 22(6.375,1.65) 23(6.375,2.15) 24(6.375,2.65) 25(6.375,3.15) 26(6.375,3.65) 27(6.375,4.15) 28(6.375,4.65) 29(6.375,5.15) 30(6.375,5.65)
  rrect50% 0.23x0.85 smd: 11(1.15,0.425) 12(1.65,0.425) 13(2.15,0.425) 14(2.65,0.425) 15(3.15,0.425) 16(3.65,0.425) 17(4.15,0.425) 18(4.65,0.425) 19(5.15,0.425) 20(5.65,0.425) 31(5.65,6.375) 32(5.15,6.375) 33(4.65,6.375) 34(4.15,6.375) 35(3.65,6.375) 36(3.15,6.375) 37(2.65,6.375) 38(2.15,6.375) 39(1.65,6.375) 40(1.15,6.375)
  round 0.6 hole 0.4: PAD(2.35,4.45) PAD(2.35,2.35) PAD(2.35,3.4) PAD(3.4,4.45) PAD(3.4,2.35) PAD(3.425,3.4) PAD(4.45,3.4) PAD(4.45,4.45) PAD(4.45,2.35)
  Top Layer region: 1.95,1.95 4.85,1.95 4.85,4.85 1.95,4.85
  silkscreen extent -0.82,0 6.8,6.8
SMB [mm] "DO-214-AA/SMB; 2 C-Bend Leads; Body 5.3 x 3.6 mm, inc. leads (LxW)"
  rect 2.3x2.3 smd: 1(-2.25,0) 2(2.25,0)
  silkscreen extent -3.8,-1.55 4.1,1.55
SOIC127P600-8AL [mm] "SOIC, 8-Leads, Body 4.9x3.9mm, Pitch 1.27mm, IPC High Density"
  oval 1.7x0.6 smd: 1(-2.45,1.905) 2(-2.45,0.635) 3(-2.45,-0.635) 4(-2.45,-1.905) 5(2.45,-1.905) 6(2.45,-0.635) 7(2.45,0.635) 8(2.45,1.905)
  silkscreen extent -2.57,-2.5 1.2,2.88, body extent -2,-2.5 2,2.5, height 2.72
SOT23-5AL [mm] "SOT23, 5-Leads, Body 2.9x1.6mm, Pitch 0.95mm, Lead Span 2.8mm, IPC High Density"
  rect 0.9x0.65 smd: 1(-1.2,0.95) 2(-1.2,0) 3(-1.2,-0.95) 4(1.2,-0.95) 5(1.2,0.95)
  silkscreen extent -1.33,-1.55 0.35,1.95, body extent -0.9,-1.55 0.9,1.55, height 1.45
SOT23A-6L [mm] "SOT23, 6-Leads, Body 2.9x1.7mm, Pitch 0.95mm, Lead Span 2.8mm, IPC High Density"
  rect 0.9x0.65 smd: 1(-1.2,0.95) 2(-1.2,0) 3(-1.2,-0.95) 4(1.2,-0.95) 5(1.2,0) 6(1.2,0.95)
  silkscreen extent -1.32,-1.55 0.35,1.95, body extent -0.9,-1.55 0.9,1.55, height 1.45
TC3528-1411 [mm] "Capacitor, SM Tantalum; Body 3.5 x 2.8 mm (LxW typ)"
  rect 2x2.2 smd: 1(-1.5,0) 2(1.5,0)
  silkscreen extent -2.82,-1.5 1.85,1.62
TFBGA324 [mm]
  round 0.4 smd: A1(0,0) A2(0.8,0) A3(1.6,0) A4(2.4,0) A5(3.2,0) A6(4,0) A7(4.8,0) A8(5.6,0) A9(6.4,0) A10(7.2,0) A11(8,0) A12(8.8,0) A13(9.6,0) A14(10.4,0) A15(11.2,0) A16(12,0) A17(12.8,0) A18(13.6,0) B1(0,-0.8) B2(0.8,-0.8) B3(1.6,-0.8) B4(2.4,-0.8) B5(3.2,-0.8) B6(4,-0.8) B7(4.8,-0.8) B8(5.6,-0.8) B9(6.4,-0.8) B10(7.2,-0.8) B11(8,-0.8) B12(8.8,-0.8) B13(9.6,-0.8) B14(10.4,-0.8) B15(11.2,-0.8) B16(12,-0.8) B17(12.8,-0.8) B18(13.6,-0.8) C1(0,-1.6) C2(0.8,-1.6) C3(1.6,-1.6) C4(2.4,-1.6) C5(3.2,-1.6) C6(4,-1.6) C7(4.8,-1.6) C8(5.6,-1.6) C9(6.4,-1.6) C10(7.2,-1.6) C11(8,-1.6) C12(8.8,-1.6) C13(9.6,-1.6) C14(10.4,-1.6) C15(11.2,-1.6) C16(12,-1.6) C17(12.8,-1.6) C18(13.6,-1.6) D1(0,-2.4) D2(0.8,-2.4) D3(1.6,-2.4) D4(2.4,-2.4) D5(3.2,-2.4) D6(4,-2.4) D7(4.8,-2.4) D8(5.6,-2.4) D9(6.4,-2.4) D10(7.2,-2.4) D11(8,-2.4) D12(8.8,-2.4) D13(9.6,-2.4) D14(10.4,-2.4) D15(11.2,-2.4) D16(12,-2.4) D17(12.8,-2.4) D18(13.6,-2.4) E1(0,-3.2) E2(0.8,-3.2) E3(1.6,-3.2) E4(2.4,-3.2) E5(3.2,-3.2) E6(4,-3.2) E7(4.8,-3.2) E8(5.6,-3.2) E9(6.4,-3.2) E10(7.2,-3.2) E11(8,-3.2) E12(8.8,-3.2) E13(9.6,-3.2) E14(10.4,-3.2) E15(11.2,-3.2) E16(12,-3.2) E17(12.8,-3.2) E18(13.6,-3.2) F1(0,-4) F2(0.8,-4) F3(1.6,-4) F4(2.4,-4) F5(3.2,-4) F6(4,-4) F7(4.8,-4) F8(5.6,-4) F9(6.4,-4) F10(7.2,-4) F11(8,-4) F12(8.8,-4) F13(9.6,-4) F14(10.4,-4) F15(11.2,-4) F16(12,-4) F17(12.8,-4) F18(13.6,-4) G1(0,-4.8) G2(0.8,-4.8) G3(1.6,-4.8) G4(2.4,-4.8) G5(3.2,-4.8) G6(4,-4.8) G7(4.8,-4.8) G8(5.6,-4.8) G9(6.4,-4.8) G10(7.2,-4.8) G11(8,-4.8) G12(8.8,-4.8) G13(9.6,-4.8) G14(10.4,-4.8) G15(11.2,-4.8) G16(12,-4.8) G17(12.8,-4.8) G18(13.6,-4.8) H1(0,-5.6) H2(0.8,-5.6) H3(1.6,-5.6) H4(2.4,-5.6) H5(3.2,-5.6) H6(4,-5.6) H7(4.8,-5.6) H8(5.6,-5.6) H9(6.4,-5.6) H10(7.2,-5.6) H11(8,-5.6) H12(8.8,-5.6) H13(9.6,-5.6) H14(10.4,-5.6) H15(11.2,-5.6) H16(12,-5.6) H17(12.8,-5.6) H18(13.6,-5.6) J1(0,-6.4) J2(0.8,-6.4) J3(1.6,-6.4) J4(2.4,-6.4) J5(3.2,-6.4) J6(4,-6.4) J7(4.8,-6.4) J8(5.6,-6.4) J9(6.4,-6.4) J10(7.2,-6.4) J11(8,-6.4) J12(8.8,-6.4) J13(9.6,-6.4) J14(10.4,-6.4) J15(11.2,-6.4) J16(12,-6.4) J17(12.8,-6.4) J18(13.6,-6.4) K1(0,-7.2) K2(0.8,-7.2) K3(1.6,-7.2) K4(2.4,-7.2) K5(3.2,-7.2) K6(4,-7.2) K7(4.8,-7.2) K8(5.6,-7.2) K9(6.4,-7.2) K10(7.2,-7.2) K11(8,-7.2) K12(8.8,-7.2) K13(9.6,-7.2) K14(10.4,-7.2) K15(11.2,-7.2) K16(12,-7.2) K17(12.8,-7.2) K18(13.6,-7.2) L1(0,-8) L2(0.8,-8) L3(1.6,-8) L4(2.4,-8) L5(3.2,-8) L6(4,-8) L7(4.8,-8) L8(5.6,-8) L9(6.4,-8) L10(7.2,-8) L11(8,-8) L12(8.8,-8) L13(9.6,-8) L14(10.4,-8) L15(11.2,-8) L16(12,-8) L17(12.8,-8) L18(13.6,-8) M1(0,-8.8) M2(0.8,-8.8) M3(1.6,-8.8) M4(2.4,-8.8) M5(3.2,-8.8) M6(4,-8.8) M7(4.8,-8.8) M8(5.6,-8.8) M9(6.4,-8.8) M10(7.2,-8.8) M11(8,-8.8) M12(8.8,-8.8) M13(9.6,-8.8) M14(10.4,-8.8) M15(11.2,-8.8) M16(12,-8.8) M17(12.8,-8.8) M18(13.6,-8.8) N1(0,-9.6) N2(0.8,-9.6) N3(1.6,-9.6) N4(2.4,-9.6) N5(3.2,-9.6) N6(4,-9.6) N7(4.8,-9.6) N8(5.6,-9.6) N9(6.4,-9.6) N10(7.2,-9.6) N11(8,-9.6) N12(8.8,-9.6) N13(9.6,-9.6) N14(10.4,-9.6) N15(11.2,-9.6) N16(12,-9.6) N17(12.8,-9.6) N18(13.6,-9.6) P1(0,-10.4) P2(0.8,-10.4) P3(1.6,-10.4) P4(2.4,-10.4) P5(3.2,-10.4) P6(4,-10.4) P7(4.8,-10.4) P8(5.6,-10.4) P9(6.4,-10.4) P10(7.2,-10.4) P11(8,-10.4) P12(8.8,-10.4) P13(9.6,-10.4) P14(10.4,-10.4) P15(11.2,-10.4) P16(12,-10.4) P17(12.8,-10.4) P18(13.6,-10.4) R1(0,-11.2) R2(0.8,-11.2) R3(1.6,-11.2) R4(2.4,-11.2) R5(3.2,-11.2) R6(4,-11.2) R7(4.8,-11.2) R8(5.6,-11.2) R9(6.4,-11.2) R10(7.2,-11.2) R11(8,-11.2) R12(8.8,-11.2) R13(9.6,-11.2) R14(10.4,-11.2) R15(11.2,-11.2) R16(12,-11.2) R17(12.8,-11.2) R18(13.6,-11.2) T1(0,-12) T2(0.8,-12) T3(1.6,-12) T4(2.4,-12) T5(3.2,-12) T6(4,-12) T7(4.8,-12) T8(5.6,-12) T9(6.4,-12) T10(7.2,-12) T11(8,-12) T12(8.8,-12) T13(9.6,-12) T14(10.4,-12) T15(11.2,-12) T16(12,-12) T17(12.8,-12) T18(13.6,-12) U1(0,-12.8) U2(0.8,-12.8) U3(1.6,-12.8) U4(2.4,-12.8) U5(3.2,-12.8) U6(4,-12.8) U7(4.8,-12.8) U8(5.6,-12.8) U9(6.4,-12.8) U10(7.2,-12.8) U11(8,-12.8) U12(8.8,-12.8) U13(9.6,-12.8) U14(10.4,-12.8) U15(11.2,-12.8) U16(12,-12.8) U17(12.8,-12.8) U18(13.6,-12.8) V1(0,-13.6) V2(0.8,-13.6) V3(1.6,-13.6) V4(2.4,-13.6) V5(3.2,-13.6) V6(4,-13.6) V7(4.8,-13.6) V8(5.6,-13.6) V9(6.4,-13.6) V10(7.2,-13.6) V11(8,-13.6) V12(8.8,-13.6) V13(9.6,-13.6) V14(10.4,-13.6) V15(11.2,-13.6) V16(12,-13.6) V17(12.8,-13.6) V18(13.6,-13.6)
  silkscreen extent -0.8,-14.4 14.4,0.8
TI_PWP_16 [mm] "SOP, 16-Leads, Body 5x4.4mm, Pitch 0.65mm, IPC High Density"
  oval 1.4x0.35 smd: 1(-2.8,2.275) 2(-2.8,1.625) 3(-2.8,0.975) 4(-2.8,0.325) 5(-2.8,-0.325) 6(-2.8,-0.975) 7(-2.8,-1.625) 8(-2.8,-2.275) 9(2.8,-2.275) 10(2.8,-1.625) 11(2.8,-0.975) 12(2.8,-0.325) 13(2.8,0.325) 14(2.8,0.975) 15(2.8,1.625) 16(2.8,2.275)
  round 1.2 hole 0.6: PAD(-0.55,-1.1) PAD(-0.55,0) PAD(-0.55,1.1) PAD(0.55,-1.1) PAD(0.55,0) PAD(0.55,1.1)
  Top Layer region: -1.15,-1.7 1.15,-1.7 1.15,1.7 -1.15,1.7
  silkscreen extent -2.92,-2.55 1.7,3.12
TQFP80P900X900-32AM [mm] "Thin QFP, 32-Leads, Body 7x7mm, Pitch 0.8mm, IPC Low Density"
  oval 1.8x0.6 smd: 1(-4.3,2.8) 2(-4.3,2) 3(-4.3,1.2) 4(-4.3,0.4) 5(-4.3,-0.4) 6(-4.3,-1.2) 7(-4.3,-2) 8(-4.3,-2.8) 17(4.3,-2.8) 18(4.3,-2) 19(4.3,-1.2) 20(4.3,-0.4) 21(4.3,0.4) 22(4.3,1.2) 23(4.3,2) 24(4.3,2.8)
  oval 0.6x1.8 smd: 9(-2.8,-4.3) 10(-2,-4.3) 11(-1.2,-4.3) 12(-0.4,-4.3) 13(0.4,-4.3) 14(1.2,-4.3) 15(2,-4.3) 16(2.8,-4.3) 25(2.8,4.3) 26(2,4.3) 27(1.2,4.3) 28(0.4,4.3) 29(-0.4,4.3) 30(-1.2,4.3) 31(-2,4.3) 32(-2.8,4.3)
  silkscreen extent -4.42,-3 3,3.77, body extent -3.51,-3.51 3.51,3.51, height 1.6
TQFP100A101 [mil]
  oval 50x12 smd: 1(0,0)
  rect 50x12 smd: 2(0,-25.59) 3(0,-51.18) 4(0,-76.77) 5(0,-102.36) 6(0,-127.95) 7(0,-153.54) 8(0,-179.13) 9(0,-204.72) 10(0,-230.32) 11(0,-255.91) 12(0,-281.5) 13(0,-307.09) 14(0,-332.68) 15(0,-358.27) 16(0,-383.86) 17(0,-409.45) 18(0,-435.04) 19(0,-460.63) 20(0,-486.22) 21(0,-511.81) 22(0,-537.4) 23(0,-562.99) 24(0,-588.58) 25(0,-614.17) 26(0,-639.76) 27(0,-665.36) 28(0,-690.95) 29(0,-716.54) 30(0,-742.13) 51(629.92,-742.13) 52(629.92,-716.54) 53(629.92,-690.95) 54(629.92,-665.36) 55(629.92,-639.76) 56(629.92,-614.17) 57(629.92,-588.58) 58(629.92,-562.99) 59(629.92,-537.4) 60(629.92,-511.81) 61(629.92,-486.22) 62(629.92,-460.63) 63(629.92,-435.04) 64(629.92,-409.45) 65(629.92,-383.86) 66(629.92,-358.27) 67(629.92,-332.68) 68(629.92,-307.09) 69(629.92,-281.5) 70(629.92,-255.91) 71(629.92,-230.32) 72(629.92,-204.72) 73(629.86,-178.61) 74(629.92,-153.54) 75(629.92,-127.95) 76(629.92,-102.36) 77(629.92,-76.77) 78(629.92,-51.18) 79(629.92,-25.59) 80(629.92,0)
  rect 12x50 smd: 31(71.85,-804.14) 32(97.44,-804.14) 33(123.03,-804.14) 34(148.62,-804.14) 35(174.21,-804.14) 36(199.8,-804.14) 37(225.39,-804.14) 38(250.98,-804.14) 39(276.58,-804.14) 40(302.17,-804.14) 41(327.76,-804.14) 42(353.35,-804.14) 43(378.94,-804.14) 44(404.53,-804.14) 45(430.12,-804.14) 46(455.71,-804.14) 47(481.3,-804.14) 48(506.89,-804.14) 49(532.48,-804.14) 50(558.07,-804.14) 81(558.07,62.01) 82(532.48,62.01) 83(506.89,62.01) 84(481.3,62.01) 85(455.71,62.01) 86(430.12,62.01) 87(404.53,62.01) 88(378.94,62.01) 89(353.35,62.01) 90(327.76,62.01) 91(302.17,62.01) 92(276.58,62.01) 93(250.98,62.01) 94(225.39,62.01) 95(199.8,62.01) 96(174.21,62.01) 97(148.62,62.01) 98(123.03,62.01) 99(97.44,62.01) 100(71.85,62.01)
  silkscreen extent 41,-763 589,21
TSOP28-1 [mm]
  rect 1x0.27 smd: 1(0,0)
  oval 1x0.27 smd: 2(0,-0.55) 3(0,-1.1) 4(0,-1.65) 5(0,-2.2) 6(0,-2.75) 7(0,-3.3) 8(0,-3.85) 9(0,-4.4) 10(0,-4.95) 11(0,-5.5) 12(0,-6.05) 13(0,-6.6) 14(0,-7.15) 15(13.4,-7.15) 16(13.4,-6.6) 17(13.4,-6.05) 18(13.4,-5.5) 19(13.4,-4.95) 20(13.4,-4.4) 21(13.4,-3.85) 22(13.4,-3.3) 23(13.4,-2.75) 24(13.4,-2.2) 25(13.4,-1.65) 26(13.4,-1.1) 27(13.4,-0.55) 28(13.4,0)
  silkscreen extent 1.33,-7.42 12.06,0.28
TSOP48_12x20 [mm]
  rect 1.1x0.22 smd: 1(0,0)
  oval 1.1x0.22 smd: 2(0,-0.5) 3(0,-1) 4(0,-1.5) 5(0,-2) 6(0,-2.5) 7(0,-3) 8(0,-3.5) 9(0,-4) 10(0,-4.5) 11(0,-5) 12(0,-5.5) 13(0,-6) 14(0,-6.5) 15(0,-7) 16(0,-7.5) 17(0,-8) 18(0,-8.5) 19(0,-9) 20(0,-9.5) 21(0,-10) 22(0,-10.5) 23(0,-11) 24(0,-11.5) 25(19.8,-11.5) 26(19.8,-11) 27(19.8,-10.5) 28(19.8,-10) 29(19.8,-9.5) 30(19.8,-9) 31(19.8,-8.5) 32(19.8,-8) 33(19.8,-7.5) 34(19.8,-7) 35(19.8,-6.5) 36(19.8,-6) 37(19.8,-5.5) 38(19.8,-5) 39(19.8,-4.5) 40(19.8,-4) 41(19.8,-3.5) 42(19.8,-3) 43(19.8,-2.5) 44(19.8,-2) 45(19.8,-1.5) 46(19.8,-1) 47(19.8,-0.5) 48(19.8,0)
  silkscreen extent 1.33,-11.75 18.47,0.25
TSOP54 [mm]
  rect 1.5x0.3 smd: 1(0,0)
  oval 1.5x0.3 smd: 2(0,-0.8) 3(0,-1.6) 4(0,-2.4) 5(0,-3.2) 6(0,-4) 7(0,-4.8) 8(0,-5.6) 9(0,-6.4) 10(0,-7.2) 11(0,-8) 12(0,-8.8) 13(0,-9.6) 14(0,-10.4) 15(0,-11.2) 16(0,-12) 17(0,-12.8) 18(0,-13.6) 19(0,-14.4) 20(0,-15.2) 21(0,-16) 22(0,-16.8) 23(0,-17.6) 24(0,-18.4) 25(0,-19.2) 26(0,-20) 27(0,-20.8) 28(11.76,-20.8) 29(11.76,-20) 30(11.76,-19.2) 31(11.76,-18.4) 32(11.76,-17.6) 33(11.76,-16.8) 34(11.76,-16) 35(11.76,-15.2) 36(11.76,-14.4) 37(11.76,-13.6) 38(11.76,-12.8) 39(11.76,-12) 40(11.76,-11.2) 41(11.76,-10.4) 42(11.76,-9.6) 43(11.76,-8.8) 44(11.76,-8) 45(11.76,-7.2) 46(11.76,-6.4) 47(11.76,-5.6) 48(11.76,-4.8) 49(11.76,-4) 50(11.76,-3.2) 51(11.76,-2.4) 52(11.76,-1.6) 53(11.76,-0.8) 54(11.76,0)
  silkscreen extent 1.83,-21.2 9.92,0.4
TSOP65P490-8AN [mm] "TSOP, 8-Leads, Body 3x3mm, Pitch 0.65mm, IPC Medium Density"
  oval 1.7x0.45 smd: 1(-2.1,0.975) 2(-2.1,0.325) 3(-2.1,-0.325) 4(-2.1,-0.975) 5(2.1,-0.975) 6(2.1,-0.325) 7(2.1,0.325) 8(2.1,0.975)
  silkscreen extent -2.22,-1.55 0.85,1.87, body extent -1.6,-1.6 1.6,1.6, height 1.1
uTCA_HOTSWAP_SWITCH [mm]
  rect 0.6x1 smd: A(0.3,-0.5) B(0.3,-3.2) C(2.5,-0.5) D(2.5,-3.2)
  round 0.6 hole 0.6 unplated: ""(0.6,-1.85)
  round 0.8 hole 0.8 unplated: ""(2.3,-1.85)
  silkscreen extent -0.4,-4.1 3.2,0.4
UTCA_MCH_TONGUE1 [mm] "uTCA MTCA.0 MCH tongue connector"
  rect 3.3x0.48 smd: 1(2.35,-31.5) 2(2.35,-30.75) 4(2.35,-29.25) 7(2.35,-27) 9(2.35,-25.5) 10(2.35,-24.75) 13(2.35,-22.5) 16(2.35,-20.25) 18(2.35,-18.75) 19(2.35,-18) 22(2.35,-15.75) 25(2.35,-13.5) 27(2.35,-12) 28(2.35,-11.25) 31(2.35,-9) 34(2.35,-6.75) 37(2.35,-4.5) 40(2.35,-2.25) 42(2.35,-0.75) 43(2.35,0) 46(2.35,2.25) 49(2.35,4.5) 52(2.35,6.75) 55(2.35,9) 57(2.35,10.5) 58(2.35,11.25) 61(2.35,13.5) 64(2.35,15.75) 67(2.35,18) 70(2.35,20.25) 72(2.35,21.75) 73(2.35,22.5) 76(2.35,24.75) 79(2.35,27) 82(2.35,29.25) 84(2.35,30.75) 85(2.35,31.5)
  rect 0.95x0.48 smd: 2mate(1.175,-19.5) 2mate(1.175,-12.75) 2mate(1.175,-1.5) 2mate(1.175,9.75) 2mate(1.175,21) 2mate(1.175,-28.5) 2mate(1.175,-27.75) 2mate(1.175,-26.25)
  rect 1.1x0.48 smd: 3(3.45,-30) 83(3.45,30)
  rect 1.7x0.48 smd: 3mate(1.55,-24) 3mate(1.55,-23.25) 3mate(1.55,-21.75) 3mate(1.55,-21) 3mate(1.55,-17.25) 3mate(1.55,-16.5) 3mate(1.55,-15) 3mate(1.55,-14.25) 3mate(1.55,-10.5) 3mate(1.55,-9.75) 3mate(1.55,-8.25) 3mate(1.55,-7.5) 3mate(1.55,-6) 3mate(1.55,-5.25) 3mate(1.55,-3.75) 3mate(1.55,-3) 3mate(1.55,0.75) 3mate(1.55,1.5) 3mate(1.55,3) 3mate(1.55,3.75) 3mate(1.55,5.25) 3mate(1.55,6) 3mate(1.55,7.5) 3mate(1.55,8.25) 3mate(1.55,12) 3mate(1.55,12.75) 3mate(1.55,14.25) 3mate(1.55,15) 3mate(1.55,16.5) 3mate(1.55,17.25) 3mate(1.55,18.75) 3mate(1.55,19.5) 3mate(1.55,23.25) 3mate(1.55,24) 3mate(1.55,25.5) 3mate(1.55,26.25) 3mate(1.55,27.75) 3mate(1.55,28.5)
  rect 1.7x0.48 smd far side: 3mate(1.55,-30.75) 3mate(1.55,-30) 3mate(1.55,-29.25) 3mate(1.55,-28.5) 3mate(1.55,-27.75) 3mate(1.55,-26.25) 3mate(1.55,-25.5) 3mate(1.55,-24) 3mate(1.55,-23.25) 3mate(1.55,-21.75) 3mate(1.55,-21) 3mate(1.55,-19.5) 3mate(1.55,-18.75) 3mate(1.55,-17.25) 3mate(1.55,-16.5) 3mate(1.55,-15) 3mate(1.55,-14.25) 3mate(1.55,-12.75) 3mate(1.55,-12) 3mate(1.55,-10.5) 3mate(1.55,-9.75) 3mate(1.55,-8.25) 3mate(1.55,-7.5) 3mate(1.55,-6) 3mate(1.55,-5.25) 3mate(1.55,-3.75) 3mate(1.55,-3) 3mate(1.55,-1.5) 3mate(1.55,-0.75) 3mate(1.55,0.75) 3mate(1.55,1.5) 3mate(1.55,3) 3mate(1.55,3.75) 3mate(1.55,5.25) 3mate(1.55,6) 3mate(1.55,7.5) 3mate(1.55,8.25) 3mate(1.55,9.75) 3mate(1.55,10.5) 3mate(1.55,12) 3mate(1.55,12.75) 3mate(1.55,14.25) 3mate(1.55,15) 3mate(1.55,16.5) 3mate(1.55,17.25) 3mate(1.55,18.75) 3mate(1.55,19.5) 3mate(1.55,21) 3mate(1.55,21.75) 3mate(1.55,23.25) 3mate(1.55,24) 3mate(1.55,25.5) 3mate(1.55,26.25) 3mate(1.55,27.75) 3mate(1.55,28.5) 3mate(1.55,30) 3mate(1.55,30.75)
  rect 2.15x0.48 smd: 5(2.925,-28.5) 6(2.925,-27.75) 8(2.925,-26.25) 17(2.925,-19.5) 26(2.925,-12.75) 41(2.925,-1.5) 56(2.925,9.75) 71(2.925,21)
  rect 1.4x0.48 smd: 11(3.3,-24) 12(3.3,-23.25) 14(3.3,-21.75) 15(3.3,-21) 20(3.3,-17.25) 21(3.3,-16.5) 23(3.3,-15) 24(3.3,-14.25) 29(3.3,-10.5) 30(3.3,-9.75) 32(3.3,-8.25) 33(3.3,-7.5) 35(3.3,-6) 36(3.3,-5.25) 38(3.3,-3.75) 39(3.3,-3) 44(3.3,0.75) 45(3.3,1.5) 47(3.3,3) 48(3.3,3.75) 50(3.3,5.25) 51(3.3,6) 53(3.3,7.5) 54(3.3,8.25) 59(3.3,12) 60(3.3,12.75) 62(3.3,14.25) 63(3.3,15) 65(3.3,16.5) 66(3.3,17.25) 68(3.3,18.75) 69(3.3,19.5) 74(3.3,23.25) 75(3.3,24) 77(3.3,25.5) 78(3.3,26.25) 80(3.3,27.75) 81(3.3,28.5)
  rect 3.3x0.48 smd far side: 86(2.35,31.5) 89(2.35,29.25) 92(2.35,27) 95(2.35,24.75) 98(2.35,22.5) 101(2.35,20.25) 104(2.35,18) 107(2.35,15.75) 110(2.35,13.5) 113(2.35,11.25) 116(2.35,9) 119(2.35,6.75) 122(2.35,4.5) 125(2.35,2.25) 128(2.35,0) 131(2.35,-2.25) 134(2.35,-4.5) 137(2.35,-6.75) 140(2.35,-9) 143(2.35,-11.25) 146(2.35,-13.5) 149(2.35,-15.75) 152(2.35,-18) 155(2.35,-20.25) 158(2.35,-22.5) 161(2.35,-24.75) 164(2.35,-27) 170(2.35,-31.5)
  rect 1.4x0.48 smd far side: 87(3.3,30.75) 88(3.3,30) 90(3.3,28.5) 91(3.3,27.75) 93(3.3,26.25) 94(3.3,25.5) 96(3.3,24) 97(3.3,23.25) 99(3.3,21.75) 100(3.3,21) 102(3.3,19.5) 103(3.3,18.75) 105(3.3,17.25) 106(3.3,16.5) 108(3.3,15) 109(3.3,14.25) 111(3.3,12.75) 112(3.3,12) 114(3.3,10.5) 115(3.3,9.75) 117(3.3,8.25) 118(3.3,7.5) 120(3.3,6) 121(3.3,5.25) 123(3.3,3.75) 124(3.3,3) 126(3.3,1.5) 127(3.3,0.75) 129(3.3,-0.75) 130(3.3,-1.5) 132(3.3,-3) 133(3.3,-3.75) 135(3.3,-5.25) 136(3.3,-6) 138(3.3,-7.5) 139(3.3,-8.25) 141(3.3,-9.75) 142(3.3,-10.5) 144(3.3,-12) 145(3.3,-12.75) 147(3.3,-14.25) 148(3.3,-15) 150(3.3,-16.5) 151(3.3,-17.25) 153(3.3,-18.75) 154(3.3,-19.5) 156(3.3,-21) 157(3.3,-21.75) 159(3.3,-23.25) 160(3.3,-24) 162(3.3,-25.5) 163(3.3,-26.25) 165(3.3,-27.75) 166(3.3,-28.5) 167(3.3,-29.25) 168(3.3,-30) 169(3.3,-30.75)
  rect 1.4x0.48 on Bottom Solder: 138(3.3,-7.5)
  rect 2x0.48 smd: lmate(1.7,30) lmate(1.7,-30)
  Keep-Out Layer region: 0,-32.5 7.9,-32.5 7.9,32.5 0,32.5
XTALL_ABM3 [mm] "Abracon ABM3 xtal series"
  rect 1.8x1.2 smd: 1(0,0) 2(4,0) 3(4,2.4) 4(0,2.4)
  silkscreen extent -1.05,-0.75 5.05,3.15
XTALL_CC7V_T1A [mm]
  rect 1x1.8 smd: 1(-1.25,0) 2(1.2,0)
  silkscreen extent -1.95,-1.05 1.9,1.05
YC124 [mm]
  rect 0.6x0.25 smd: 1(-0.5,0.75)
  oval 0.6x0.25 smd: 2(-0.5,0.25) 3(-0.5,-0.25) 4(-0.5,-0.75) 5(0.5,-0.75) 6(0.5,-0.25) 7(0.5,0.25) 8(0.5,0.75)
  silkscreen extent -0.75,-1 0.75,1